# Altium PCB logic analyzer.pcbdoc
Units mil, origin at the board's own origin, x right, y up, seen from the top; angles counter-clockwise.
Board outline 1771.65 x 984.25 mil, 2 copper layers (Top Layer, Bottom Layer); 46 components, 39 nets, 224 pads, 64 vias.
Unrouted connection lines stored in the file: 47.
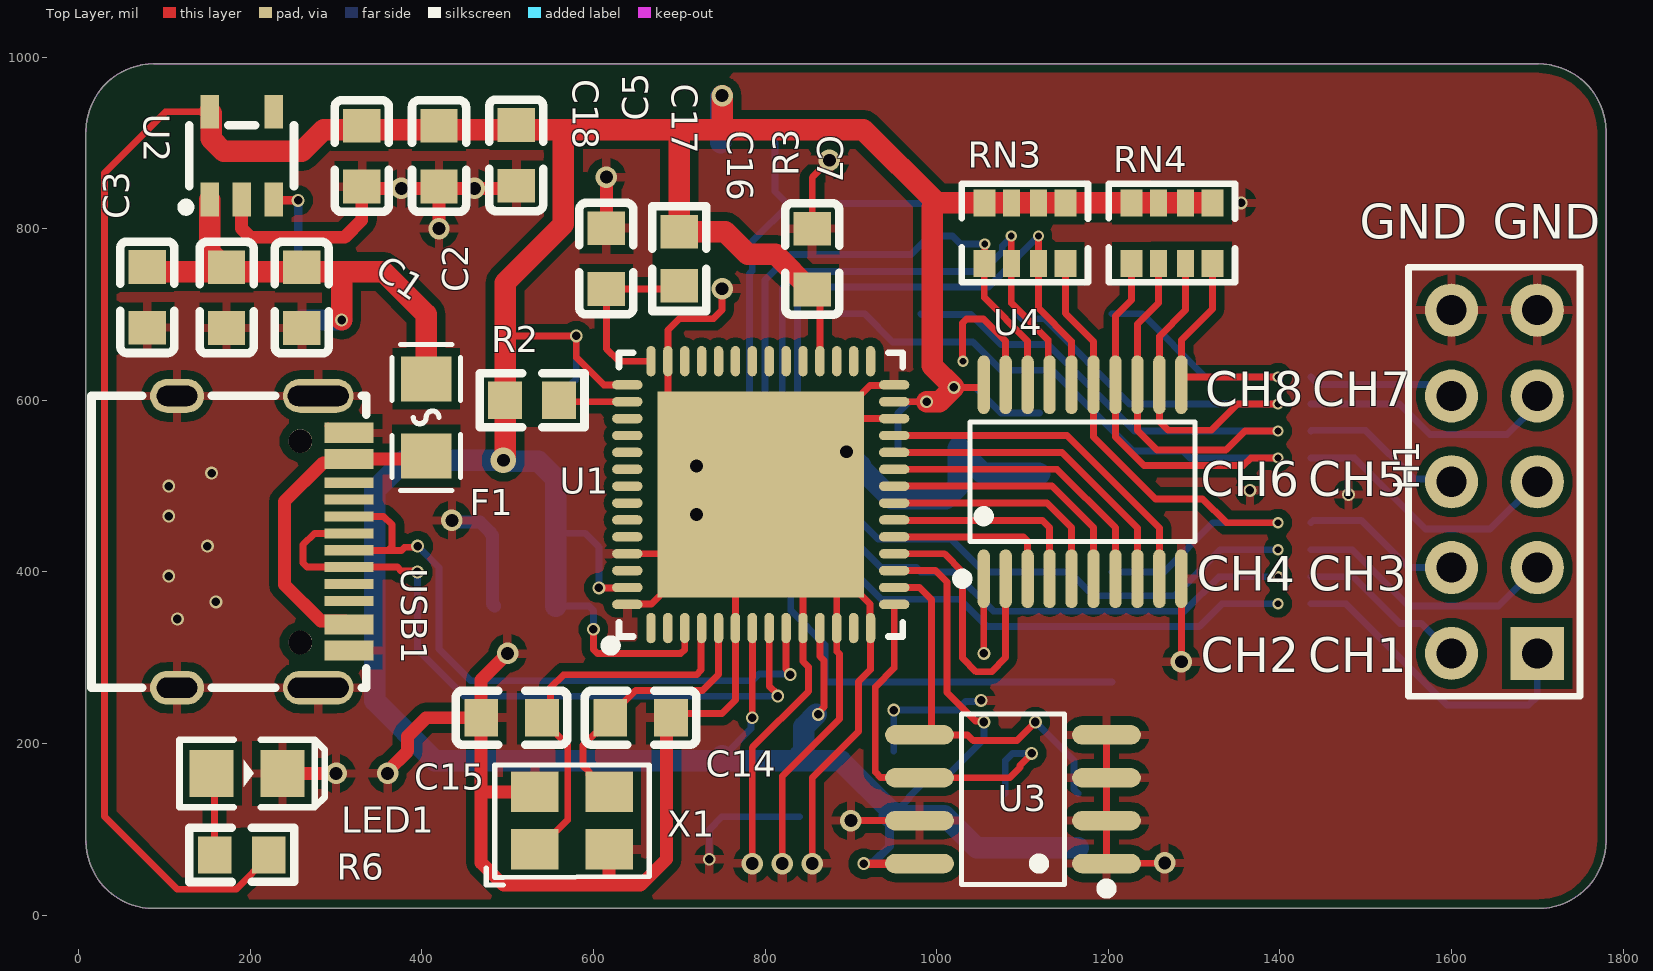
[diagram p0: Top Layer view]
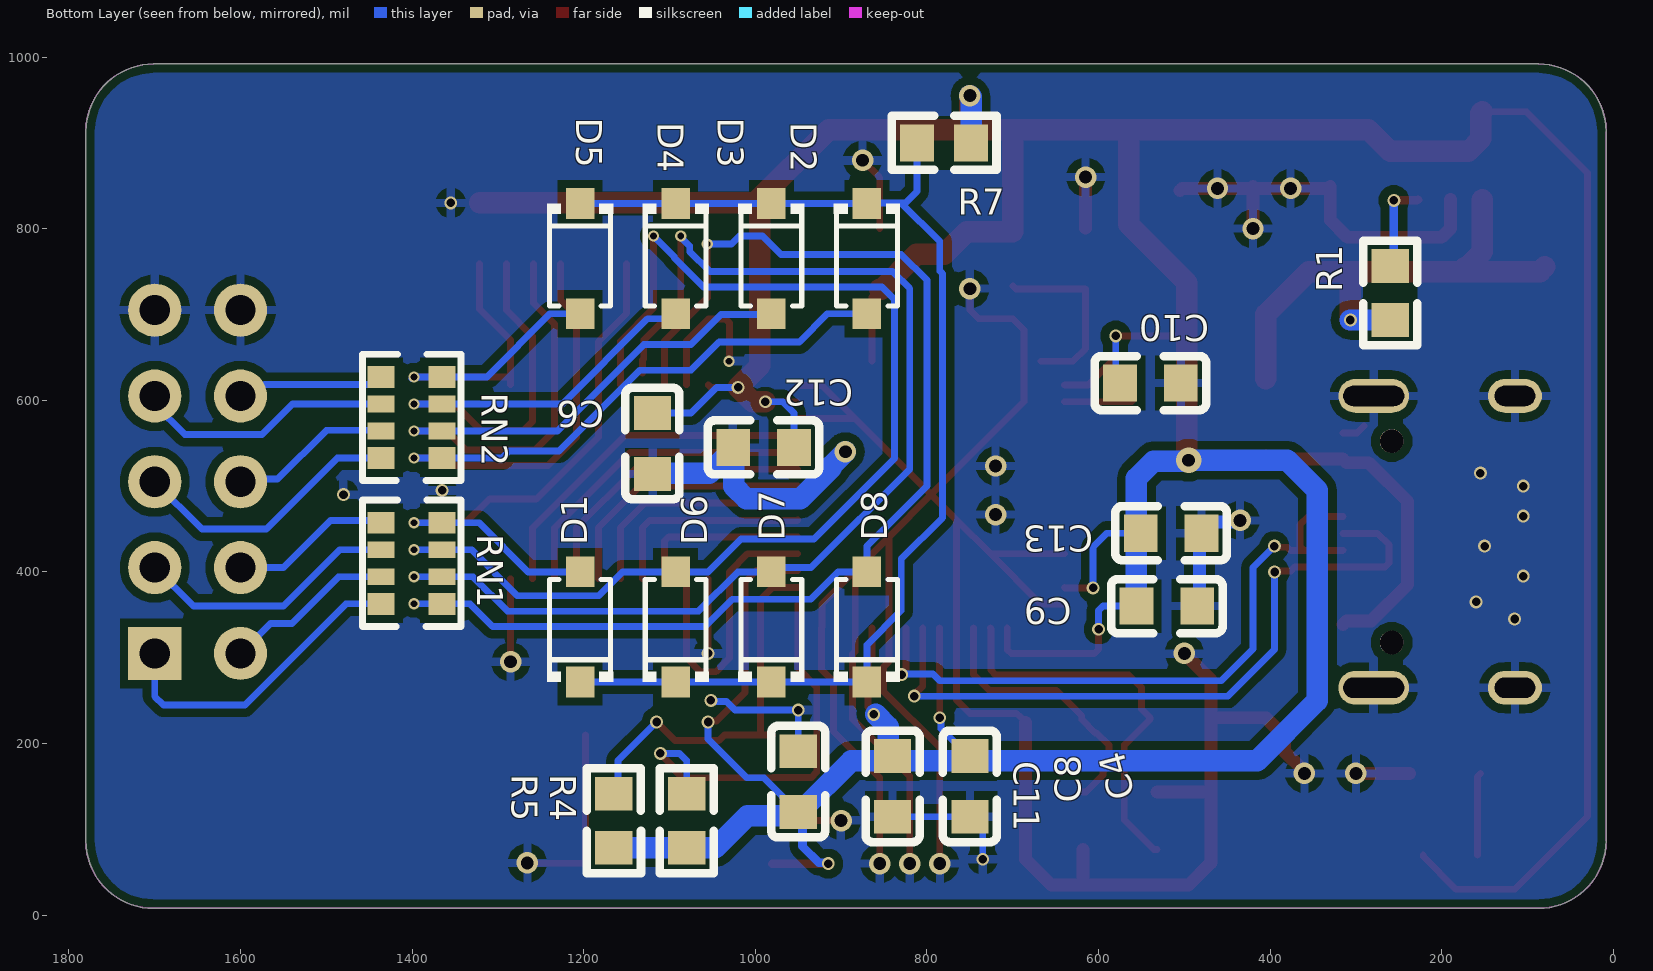
[diagram p1: Bottom Layer view, seen from below]

## Layer stack, top to bottom
Top Solder: solder mask 0.4, Solder Resist, Dk 3.5
Top Layer: signal copper 1.4
Dielectric1: dielectric 12.6, FR-4, Dk 4.8
Bottom Layer: signal copper 1.4
Bottom Solder: solder mask 0.4, Solder Resist, Dk 3.5

## Board outline
8.51,86.42 8.51,913.2 cw(c87.25,913.2) 87.25,991.94 1701.43,991.94 cw(c1701.43,913.2) 1780.17,913.2 1780.17,86.42 cw(c1701.43,86.42) 1701.43,7.68 87.25,7.68 cw(c87.25,86.42)

## Design rules (kind name [scope] priority, off if disabled: settings)
Clearance [All] p1: gap=10 ignorepadtopadclearanceinfootprint=TRUE except(0: Arc-Hole Track-Hole SMDPad-Hole THPad-Hole Via-Hole Fill-Hole Poly-Hole Region-Hole Text-Hole; 6: Arc-SMDPad Track-SMDPad)
PolygonConnect [All] p1: connectstyle=Relief reliefconductorwidth=10 reliefentries=4 polygonreliefangle="90 Angle" airgapwidth=10
RoutingVias [All] p1: holewidth=28 width=50 viastyle="Through Hole" minholewidth=5 minwidth=10 maxholewidth=99 maxwidth=100
SolderMaskExpansion [All] p1: expansion=4 istentingtop=FALSE
Width [All] p1: maxlimit=100 minlimit=6 preferedwidth=10 minimp=50.000000 maximp=50.000000 favimp=50.000000
30 further rules are at their usual default settings.

## Components (designator, comment, footprint, x,y, rotation, side; value= is the part's Value field where it differs from the comment)
C1 "0.1u" C0603 172.5,719.57 r90 top
C2 "0.1u" C0603 260,719.57 r90 top
C3 "0.1u" C0603 80,720 r90 top
C4 "0.1u" C0603 750,150 r90 bottom
C5 "0.1u" C0603 420,884.57 r90 top
C6 "0.1u" C0603 1120,549.57 r90 bottom
C7 "0.1u" C0603 855,764.57 r270 top
C8 "0.1u" C0603 840,150 r90 bottom
C9 "0.1u" C0603 520.43,360 r0 bottom
C10 "0.1u" C0603 539.57,620 r0 bottom
C11 "0.1u" C0603 950,155.43 r270 bottom
C12 "0.1u" C0603 990.43,545 r180 bottom
C13 "0.1u" C0603 515.43,445 r0 bottom
C14 "0.1u" C0603 655,230 r180 top
C15 "0.1u" C0603 504.57,230 r0 top
C16 "0.1u" C0603 615,765 r270 top
C17 "0.1u" C0603 510,885.43 r270 top
C18 "0.1u" C0603 330,884.57 r270 top
D1 "1N4148W" SOD-123_L3.1-W1.7-LS3.7-RD 1204.29,335.83 r90 bottom
D2 "1N4148W" SOD-123_L3.1-W1.7-LS3.7-RD 870,765 r270 bottom
D3 "1N4148W" SOD-123_L3.1-W1.7-LS3.7-RD 981.43,765 r270 bottom
D4 "1N4148W" SOD-123_L3.1-W1.7-LS3.7-RD 1092.86,765 r270 bottom
D5 "1N4148W" SOD-123_L3.1-W1.7-LS3.7-RD 1204.29,765 r270 bottom
D6 "1N4148W" SOD-123_L3.1-W1.7-LS3.7-RD 1092.86,335.83 r90 bottom
D7 "1N4148W" SOD-123_L3.1-W1.7-LS3.7-RD 981.43,335.83 r90 bottom
D8 "1N4148W" SOD-123_L3.1-W1.7-LS3.7-RD 870,335.83 r90 bottom
F1 "MF-PSMF075X-2" F0805 405,580 r90 top
H1 "HDR-F-2.54_2x5" HDR-F-2.54_2X5 1650,505 r90 top
LED1 "LED-0805_R" LED0805_RED 196.35,165 r0 top
R1 "10K" R0603 260,725 r90 bottom
R2 "10k" R0603 528.5,600 r0 top
R3 "1k" R0603 700,765 r90 top
R4 "10K" R0603 1080,110 r270 bottom
R5 "10K" R0603 1165,110 r270 bottom
R6 "1k" R0603 190,70 r0 top
R7 "1k" R0603 780,900 r180 bottom
RN1 "100R" RES-ARRAY-SMD_0603-8P-L3.2-W1.6-BL 1400.79,410 r270 bottom
RN2 "100R" RES-ARRAY-SMD_0603-8P-L3.2-W1.6-BL 1400.79,580 r270 bottom
RN3 "470" RES-ARRAY-SMD_0603-8P-L3.2-W1.6-BL 1102.76,794.57 r0 top
RN4 "100K" RES-ARRAY-SMD_0603-8P-L3.2-W1.6-BL 1274.25,794.57 r0 top
U1 "CY7C68013A-56LTXC" QFN-56_L8.0-W8.0-P0.50-TL-EP 795,490 r90 top
U2 "RT9013-33GB" SOT-23-5_L3.0-W1.7-P0.95-LS2.8-BR 190,885 r270 top
U3 "AT24C02" SOP-8_L5.0-W4.0-P1.27-LS6.0-BL 1088.97,135 r90 top
U4 "74HC245PW-Q100J" TSSOP-20_L6.5-W4.4-P0.65-LS6.4-BL 1170,505 r0 top
USB1 "TYPEC-304-BCP16" USB-C-SMD_TYPEC-304-BCP16 215,435 r270 top
X1 "24MHz" OSC-SMD_4P-L3.2-W2.5-BL 575,110 r0 top

## Footprints (in the part's own frame and the unit in brackets; to place one, negate y for a bottom-side part, rotate by r counter-clockwise, add the part's x,y. Pads: shape width x height; smd on the part's side, far side on the other; paste and mask are expansions set on the pad)
C0603 [mm]
  rect 1x1.1 smd: 1(-0.9,0) 2(0.9,0)
  silkscreen extent -1.65,-0.8 1.65,0.8
F0805 [mm]
  rect 1.335x1.5 smd: 1(-1.142,0) 2(1.142,0)
  silkscreen extent -2.16,-1.02 2.16,1.02
HDR-F-2.54_2X5 [mil]
  rect 62x62 hole 35: 1(-200,-50)
  round 62 hole 35: 2(-200,50) 3(-100,-50) 4(-100,50) 5(0,-50) 6(0,50) 7(100,-50) 8(100,50) 9(200,-50) 10(200,50)
  silkscreen extent -250,-100 250,100
LED0805_RED [mil]
  rect 51.2x55.1 smd: 1(-41.35,0) 2(41.35,0)
  silkscreen extent -79,-39 91,39
OSC-SMD_4P-L3.2-W2.5-BL [mm]
  rect 1.4x1.2 smd: 1(-1.1,-0.851) 2(1.1,-0.851) 3(1.1,0.851) 4(-1.1,0.851)
  silkscreen extent -2.54,-1.91 2.29,1.65
QFN-56_L8.0-W8.0-P0.50-TL-EP [mm]
  oval 0.9x0.28 smd: 1(-3.95,3.25) 2(-3.95,2.75) 3(-3.95,2.25) 4(-3.95,1.75) 5(-3.95,1.25) 6(-3.95,0.75) 7(-3.95,0.25) 8(-3.95,-0.25) 9(-3.95,-0.75) 10(-3.95,-1.25) 11(-3.95,-1.75) 12(-3.95,-2.25) 13(-3.95,-2.75) 14(-3.95,-3.25) 29(3.95,-3.25) 30(3.95,-2.75) 31(3.95,-2.25) 32(3.95,-1.75) 33(3.95,-1.25) 34(3.95,-0.75) 35(3.95,-0.25) 36(3.95,0.25) 37(3.95,0.75) 38(3.95,1.25) 39(3.95,1.75) 40(3.95,2.25) 41(3.95,2.75) 42(3.95,3.25)
  oval 0.28x0.9 smd: 15(-3.25,-3.95) 16(-2.75,-3.95) 17(-2.25,-3.95) 18(-1.75,-3.95) 19(-1.25,-3.95) 20(-0.75,-3.95) 21(-0.25,-3.95) 22(0.25,-3.95) 23(0.75,-3.95) 24(1.25,-3.95) 25(1.75,-3.95) 26(2.25,-3.95) 27(2.75,-3.95) 28(3.25,-3.95) 43(3.25,3.95) 44(2.75,3.95) 45(2.25,3.95) 46(1.75,3.95) 47(1.25,3.95) 48(0.75,3.95) 49(0.25,3.95) 50(-0.25,3.95) 51(-0.75,3.95) 52(-1.25,3.95) 53(-1.75,3.95) 54(-2.25,3.95) 55(-2.75,3.95) 56(-3.25,3.95)
  rect 6.1x6.1 smd: 57(0,0)
  silkscreen extent -4.62,-4.2 4.2,4.59
R0603 [mm]
  rect 1x1.1 smd: 1(-0.8,0) 2(0.8,0)
  silkscreen extent -1.55,-0.8 1.55,0.81
RES-ARRAY-SMD_0603-8P-L3.2-W1.6-BL [mm]
  rect 0.65x0.8 smd: 1(-1.2,-0.9) 4(1.2,-0.9) 5(1.2,0.9) 8(-1.2,0.9)
  rect 0.5x0.8 smd: 2(-0.4,-0.9) 3(0.4,-0.9) 6(0.4,0.9) 7(-0.4,0.9)
  silkscreen extent -1.87,-1.45 1.87,1.47
SOD-123_L3.1-W1.7-LS3.7-RD [mm]
  rect 0.91x0.84 smd: 1(-1.63,0) 2(1.63,0)
  silkscreen extent -1.63,-0.98 1.4,0.98
SOP-8_L5.0-W4.0-P1.27-LS6.0-BL [mil]
  oval 22.6x80.14 smd: 1(-75,-108.97) 2(-25,-108.97) 3(25,-108.97) 4(75,-108.97) 5(75,108.97) 6(25,108.97) 7(-25,108.97) 8(-75,108.97)
  silkscreen extent -110,-115 99,60
SOT-23-5_L3.0-W1.7-P0.95-LS2.8-BR [mm]
  rect 1x0.55 smd: 1(1.3,-0.95) 2(1.3,0) 3(1.3,0.95) 4(-1.3,0.95) 5(-1.3,-0.95)
  silkscreen extent -0.9,-1.78 1.65,1.55
TSSOP-20_L6.5-W4.4-P0.65-LS6.4-BL [mm]
  oval 0.364x1.742 smd: 1(-2.925,-2.871) 2(-2.275,-2.871) 3(-1.625,-2.871) 4(-0.975,-2.871) 5(-0.325,-2.871) 6(0.325,-2.871) 7(0.975,-2.871) 8(1.625,-2.871) 9(2.275,-2.871) 10(2.925,-2.871) 11(2.925,2.871) 12(2.275,2.871) 13(1.625,2.871) 14(0.975,2.871) 15(0.325,2.871) 16(-0.325,2.871) 17(-0.975,2.871) 18(-1.625,2.871) 19(-2.275,2.871) 20(-2.925,2.871)
  silkscreen extent -3.71,-3.02 3.33,1.77
USB-C-SMD_TYPEC-304-BCP16 [mm]
  oval 1x2.1 hole 0.6 slot 1.8 at 90 deg: 13(-4.32,1.633) 14(4.32,1.633)
  oval 1x1.6 hole 0.6 slot 1.2 at 90 deg: 15(-4.32,-2.547) 16(4.32,-2.547)
  rect 0.6x1.45 smd: A1B12(-3.225,2.547) A4B9(-2.45,2.547) B1A12(3.22,2.547) B4A9(2.45,2.547)
  rect 0.3x1.45 smd: A5(-1.25,2.547) A6(-0.25,2.547) A7(0.25,2.547) A8(1.25,2.547) B5(1.75,2.547) B6(0.75,2.547) B7(-0.75,2.547) B8(-1.75,2.547)
  round 0.7 hole 0.7 unplated: ""(-2.98,1.102) ""(2.98,1.102)
  silkscreen extent -4.32,-5.08 4.32,3.05

## Via types
v1: diameter 15, hole 10, Top Layer to Bottom Layer, 31 vias
v2: diameter 25, hole 15, Top Layer to Bottom Layer, 20 vias
v3: diameter 13, hole 8, Top Layer to Bottom Layer, 12 vias
v4: diameter 30, hole 15, Top Layer to Bottom Layer, 1 vias

## Nets (pads, with @x,y where several pads share a name; then routed paths per layer and width w, separated by ;. In a path a pad name is that pad's centre, name@x,y a point inside that pad or via, vN(x,y) a via of type N, cw(c..) or ccw(c..) an arc to the next point about the centre after c; other vN are vias at no path point)
3V3: C4.2 C5.2 C6.2 C7.2 C8.2 C9.2 C10.2 C11.2 C12.2 C13.2 C17.1 C18.1 R2.1 R3.2 R4.2 R5.2 R6.2 R7.2 RN3.5 RN3.6 RN3.7 RN3.8 RN4.5 RN4.6 RN4.7 RN4.8 U1.3 U1.7 U1.11 U1.17 U1.27 U1.32 U1.43 U1.55 U2.5 U3.8 U4.20 | length 6851.9
  Top Layer w8: U2.5 101.19,936.19 30,865 30,115 115,30 183.46,30 221.5,68.03 R6.2 ; 497.01,668.51 503.51,675 v1(580,675) 580,650 612.05,617.95 U1.43 ; v1(600,333.05) 600,309.69 604.69,305 701.73,305 706.42,309.69 U1.3 ; v1(606.3,381.3) 639.06,381.3 U1.55 ; v1(785,230) 785,276.98 785.16,277.14 U1.7 ; C7.2 863.9,720.23 U1.32 ; v1(861.95,233.84) 861.95,235.74 868.82,242.61 868.82,296.63 863.9,301.56 U1.11 ; U1.17 998.58,401.42 1012,388 1012,259.58 1045.24,226.34 1053.66,226.34 v1(1055,225) ; U1.27 v1(988.27,598.27) ; v1(1020,615) 1051.92,615 1054.84,617.92 U4.20
  Top Layer w10: v1(915,60) U3.8
  Top Layer w25: U2.5 154.28,934.51 154.28,904.64 168.92,890 260,890 285.43,915.43 330,915.43 420,915.43 505,915.43 565,915.43 ; v4(495,530) 497.01,532.01 R2.1 497.01,668.51 497.01,737.01 565,805 565,915.43 ; v2(750,955) 750,915.43 ; C7.2 853.03,729.13 812.17,770 780,770 753.5,796.5 R3.2 700,910.86 704.57,915.43 ; v1(988.27,598.27) 1003.27,598.27 v1(1020,615) 995,640 995,825 1000,830 ; RN4.5 RN4.6 RN4.7 RN4.8 RN3.5 RN3.6 RN3.7 RN3.8 1000,830 ; 565,915.43 704.57,915.43 ; 704.57,915.43 750,915.43 ; 750,915.43 914.56,915.43 1000,830
  Bottom Layer w8: C13.2 555.87,445 590,445 606.3,428.7 v1(606.3,381.3) ; C9.2 595,360 600,355 v1(600,333.05) ; C10.2 580,625 v1(580,675) ; C4.2 751.97,185.43 783.66,217.13 783.66,228.66 v1(785,230) ; C11.2 951.97,120 967.65,135.68 967.65,137.65 990,160 1010,160 1055,205 v1(1055,225) ; C12.2 955,585 968.27,598.27 v1(988.27,598.27) ; v1(1020,615) 1045,615 1075,585 C6.2
  Bottom Layer w10: v1(915,60) 915.91,60.91 925.91,60.91 945,80 C11.2@945,115
  Bottom Layer w25: C9.2 555.87,445 555.87,509.13 535.96,529.04 495.96,529.04 v4(495,530) 380,530 345,495 345,250 415,180 C4.2@755.43,180 ; R7.2 748.5,953.5 v2(750,955) ; C4.2 C4.2@755.43,180 ; C8.2@840,180 888.03,180 948.03,120 C11.2 ; v1@859.64,233.84 845,219.2 845,190.43 C8.2 834.57,180 C4.2@755.43,180 ; C11.2@945,115 945.85,115.85 1009.15,115.85 1046.49,78.5 R4.2 R5.2
+5V: C1.2 C2.2 C3.2 F1.2 R1.1 U2.1 | length 615.6
  Top Layer w25: C3.2 85.43,750 310,750 ; U2.1 152.6,772.93 170.53,755 C1.2 ; v1(306.49,693.51) 306.49,746.49 310,750 ; F1.2 405,700 355,750 310,750
  Bottom Layer w25: R1.1 v1(306.49,693.51)
D1_1: D1.1 D2.1 D3.1 D4.1 D5.1 D6.1 D7.1 D8.1 R7.1 | length 1404.2
  Bottom Layer w8: R7.1 811.49,843.51 825,830 830,830 ; D1.1 D6.1 D7.1 D8.1 870,315 830,355 830,415 782,463 782,747.46 785,750.46 785,785 830,830 ; D5.1 D4.1 D3.1 871.65,829.17 870.83,830 830,830
DN: U1.9 USB1.A7 USB1.B7 | length 782.2
  Top Layer w8: USB1.A7 315.45,425 360.31,425 ; USB1.B7 355.47,464.53 365,455 365,429.69 360.31,425 ; v1(395,430) 393.66,428.66 379.97,428.66 376.31,425 360.31,425 ; U1.9 824.53,286.96 829.32,282.17 v1(829.32,280.27)
  Bottom Layer w8: v1(395,430) 420,405 420,310 457,273 785,273 792.95,280.95 828.65,280.95 v1(829.32,280.27)
DP: U1.8 USB1.A6 USB1.B6 | length 834.5
  Top Layer w8: USB1.A6 274.75,444.85 261.5,431.59 261.5,410.16 266.19,405.47 USB1.B6 371.5,405.47 375.84,401.14 393.46,401.14 v1(394.8,399.8) ; U1.8 804.84,267.05 814.8,257.1 v1(814.8,255.2)
  Bottom Layer w8: v1(394.8,399.8) 395,399.59 395,309.54 449.54,255 814.59,255 v1(814.8,255.2)
GND: C1.1 C2.1 C3.1 C4.1 C5.1 C6.1 C7.1 C8.1 C9.1 C10.1 C11.1 C12.1 C13.1 C14.1 C15.1 C16.1 C17.2 C18.2 H1.9 H1.10 LED1.2 U1.6 U1.10 U1.12 U1.14 U1.26 U1.28 U1.41 U1.53 U1.56 U1.57 U2.2 U3.1 U3.2 U3.3 U3.4 U3.7 U4.1 U4.10 U4.19 USB1.13 USB1.14 USB1.15 USB1.16 USB1.A1B12 USB1.B1A12 X1.2 X1.4 | length 5519.1
  Top Layer w8: USB1.13 USB1.13@290.75,593.6 ; USB1.A1B12@290.75,569.78 298.56,561.97 USB1.A1B12 ; U1.56 640.05,362.61 667.61,362.61 U1.57@726.1,421.1 ; U1.53 U1.57@726.1,421.1 ; C14.1@685,224.57 C14.1 695.43,235 750,235 765.47,250.47 U1.6 U1.57@765.47,460.47 ; v2(750,730) 750,705 740,695 700,695 686.73,681.73 U1.41 686.73,598.27 U1.57 ; v2(785,60) 785,195 850.82,260.82 850.82,289.18 844.21,295.79 U1.10 U1.57@844.21,440.79 ; v2(820,60) 820,161.49 886.82,228.31 886.82,304.09 883.58,307.33 U1.12 U1.57@883.58,401.42 ; v2@855,55 855,160 908.97,213.97 908.97,271.92 922.95,285.9 U1.14 922.39,335.05 922.39,362.61 U1.57@883.58,401.42 ; C7.1 855,859.39 875,879.39 v2(875,879.69) ; v2@895,115 v2(900,110) U3.7 ; U1.26 U1.57@883.58,578.58 ; U1.28 949.95,617.39 922.39,617.39 U1.57@883.58,578.58 ; v3(1030.51,645.51) 1030,646.01 1030,690.09 1034.69,694.77 1054.77,694.77 1080.43,669.11 U4.19 ; U4.1 1054.92,391.89 1054.92,305.08 v1(1055,305) ; U3.4 U3.3 U3.2 U3.1 1198.33,60.4 1265.4,60.4 v2(1265.79,60.79) ; v2@1285,295 v2(1285.16,295.16) U4.10 ; U1.57@726.1,421.1 U1.57@765.47,460.47 ; U1.57@765.47,460.47 U1.57 ; U1.57 U1.57@844.21,440.79 ; U1.57 U1.57@883.58,578.58 ; U1.57@844.21,440.79 U1.57@883.58,401.42
  Top Layer w15: U2.2 190,800 200,790 310,790 330,810 C18.2 332.28,846.85 C5.1@420,846.85 ; LED1.2 v2(300,165) ; v2(360,165) 360,167.58 383.46,191.04 383.46,208.46 405,230 C15.1 ; v2(420,800) C5.1@420,846.85 ; C5.1 C5.1@420,846.85 ; v2(500,305) 469.13,274.13 C15.1 ; C17.2@505,844.57 502.72,846.85 C5.1@420,846.85 ; X1.4 471.06,143.51 469.13,145.43 ; C16.1 v2(615,860) ; X1.2 618.31,36.69 620,35 ; C14.1@685,224.57 685,65 655,35 620,35 ; 469.13,145.43 C15.1 ; 469.13,145.43 469.13,60.87 495,35 620,35
  Bottom Layer w8: v1(735,65) 735,99.57 C4.1 C8.1 ; C11.1 v1(950,238.77) 1023.77,238.77 1033.81,248.81 1050.49,248.81 v1(1051.83,250.15) ; C12.1@1025.87,543.03 C12.1
  Bottom Layer w15: v2(435,460) 436.91,458.09 467.81,458.09 480,445.9 C13.1 482.5,442.5 482.5,362.5 C9.1
  Bottom Layer w25: v2(895,540) 911.33,523.67 911.33,521.17 947.5,485 1010.36,485 1025,499.64 1025,544.13 C12.1 ; C12.1@1025.87,543.03 1053.9,515 1119.13,515 C6.1
  other v1: 115,345 160,365 105,395 150,430 105,465 1480,490 1365,495 105,500 155,515 1355,830
  other v2: 855,60 720,466.67 720,523.33 376.14,846.85 461.36,846.85
IN0: D8.2 RN1.5 RN3.1 U4.18 | length 1400.8
  Top Layer w8: v3(1056.02,782.06) 1056.02,759.65 RN3.1 1055.52,719.48 1106.02,668.98 U4.18
  Bottom Layer w8: v3(1056.02,782.06) 1027.86,782.06 1018.36,791.55 991.55,791.55 970,770 830,770 800,740 800,500 870,430 D8.2 903.77,400 935.72,368.04 1026.96,368.04 1058.91,336.09 1306.09,336.09 1332.76,362.76 RN1.5 v3(1397.77,362.76)
IN1: D7.2 RN1.6 RN3.2 U4.17 | length 1348.4
  Top Layer w8: v3(1087.01,791.55) RN3.2 1087.01,713.45 1130,670.46 1130,648.48 1131.61,646.87 U4.17@1131.61,631.59
  Bottom Layer w8: v3(1087.01,791.55) 1087.01,790.19 1076.52,779.71 1076.52,773.56 1052.96,750 840,750 820,730 820,520 935,405 976.43,405 D7.2 1020.46,400 1066.37,354.09 1289.09,354.09 1329.25,394.25 RN1.6 v3(1397.77,394.25)
IN2: D6.2 RN1.7 RN3.3 U4.16 | length 1335.3
  Top Layer w8: v3(1118.51,791.55) RN3.3 1118.51,707.4 1157.2,668.71 U4.16
  Bottom Layer w8: v3(1118.51,791.55) 1094.52,767.56 1094.52,766.11 1060.42,732 852.58,732 838,717.42 838,532 931.66,438.34 1016.66,438.34 1055,400 D6.2 1155,400 1182.91,372.09 1277.09,372.09 1330.75,425.75 RN1.7 v3(1397.77,425.75)
IN3: D1.2 RN1.8 RN3.4 U4.15 | length 689.1
  Top Layer w8: RN3.4 1150,701.37 1182.8,668.57 U4.15 1182.8,557.21 1255,485 1310,485 1337.76,457.24 v3(1397.76,457.24)
  Bottom Layer w8: D1.2 1265,400 1322.24,457.24 RN1.8 v3(1397.76,457.24)
IN4: D2.2 RN2.5 RN4.1 U4.14 | length 1013.9
  Top Layer w8: RN4.1 1227.01,717.01 1208.39,698.39 U4.14 1208.39,557.07 1241.46,524 1357.33,524 1366.09,532.76 v3(1397.77,532.76)
  Bottom Layer w8: D2.2 915.85,700.83 948.77,667.91 1042.09,667.91 1075,635 1134.54,635 1228.91,540.63 1287.32,540.63 1295.2,532.76 v3(1397.77,532.76)
IN5: D3.2 RN2.6 RN4.2 U4.13 | length 859.8
  Top Layer w8: RN4.2 1258.5,713.5 1233.98,688.98 1233.98,564.82 1256.8,542 1337,542 1359.25,564.25 v3(1397.77,564.25)
  Bottom Layer w8: D3.2 982.26,700 1040,700 1075,665 1130,665 1230.75,564.25 RN2.6 v3(1397.77,564.25)
IN6: D4.2 RN2.7 RN4.3 U4.12 | length 700
  Top Layer w8: RN4.3 1290,705 1259.57,674.57 1259.57,575.43 1270,565 1320,565 1350.75,595.75 v3(1397.77,595.75)
  Bottom Layer w8: D4.2 1098.68,695 1125.46,695 1224.71,595.75 RN2.7 v3(1397.77,595.75)
IN7: D5.2 RN2.8 RN4.4 U4.11 | length 497.1
  Top Layer w8: U4.11 U4.11@1285.16,624.31 ; RN4.4 1321.49,706.49 1285.16,670.16 U4.11@1285.16,624.31 ; v3(1397.76,627.24) 1288.08,627.24 U4.11@1285.16,624.31
  Bottom Layer w8: D5.2 1239.17,700.83 1312.76,627.24 RN2.8 v3(1397.76,627.24) v3@1400,625
P0: H1.1 RN1.4 | length 366.7
  Bottom Layer w8: RN1.4 1477.24,362.76 1595,245 1690,245 1700,255 H1.1
P1: H1.2 RN1.3 | length 200.7
  Bottom Layer w8: RN1.3 1485.75,394.25 1540,340 1565,340 H1.2
P2: H1.3 RN1.2 | length 309.7
  Bottom Layer w8: RN1.2 1484.25,425.75 1550,360 1655,360 H1.3
P3: H1.4 RN1.1 | length 187.7
  Bottom Layer w8: RN1.1 1438.97,460 1495,460 1550,405 H1.4
P4: H1.5 RN2.4 | length 320.8
  Bottom Layer w8: RN2.4 1487.24,532.76 1570,450 1645,450 H1.5
P5: H1.6 RN2.3 | length 188.9
  Bottom Layer w8: RN2.3 1436.97,565 1500,565 1557,508 1597,508 H1.6
P6: H1.7 RN2.2 | length 303.1
  Bottom Layer w8: RN2.2 1539.25,595.75 1575,560 1665,560 1700,595 H1.7
P7: H1.8 RN2.1 | length 173
  Bottom Layer w8: RN2.1 1445.01,618.45 1571.94,618.45 1585.39,605 H1.8
R6_1: LED1.1 R6.1 | length 96.5
  Top Layer w8: LED1.1 158.51,161.49 R6.1
SCL: R4.1 U1.15 U3.6 | length 475.6
  Top Layer w8: U1.15 950.51,288 928.44,265.93 928.44,166.65 934.69,160.41 979.59,160.41 U3.6 1085,160 1097.19,172.19 1097.19,174.34 1110.71,187.87 v1(1110.71,188.39)
  Bottom Layer w8: R4.1 1080,180 1088.39,188.39 v1(1110.71,188.39)
SDA: R5.1 U1.16 U3.5 | length 458.1
  Top Layer w8: U1.16 980,381.73 994,367.73 994,210.74 U3.5@993.26,210 ; U3.5 U3.5@993.26,210 ; v1(1115,225) 1093.5,203.5 1042.62,203.5 1036.12,210 U3.5@993.26,210
  Bottom Layer w8: v1(1115,225) 1160,180 1160,146.49 R5.1
U1_4: C15.2 U1.4 X1.1 | length 456.5
  Top Layer w8: X1.1 535.63,76.5 570,110.87 570,198.03 540,228.03 C15.2 550,240 550,265 565,280 720,280 725.52,285.52 725.52,333.91 U1.4
U1_5: C14.2 U1.5 X1.3 | length 317.7
  Top Layer w8: X1.3 614.37,143.51 594.75,163.13 594.75,167.07 588,173.81 588,198 602.35,212.35 603.88,212.35 619.57,228.03 619.57,231.97 649.25,261.65 727.11,261.65 745.79,280.33 U1.5
U1_18: U1.18 U4.2 | length 344.5
  Top Layer w8: U1.18 1008.9,421.1 1030,400 1030,299.59 1046.09,283.5 1063.91,283.5 1080.43,300.03 U4.2
U1_19: U1.19 U4.3 | length 201.6
  Top Layer w8: U1.19 1101.34,440.79 1106.02,436.1 U4.3
U1_20: U1.20 U4.4 | length 244.5
  Top Layer w8: U1.20 950.98,460 1123.45,460 1131.61,451.84 U4.4
U1_21: U1.21 U4.5 | length 278.2
  Top Layer w8: U1.21 1128.75,480.16 1157.2,451.7 U4.5
U1_22: U1.22 U4.6 | length 312
  Top Layer w8: U1.22 950.67,500 1134.36,500 1182.8,451.57 U4.6
U1_23: U1.23 U4.7 | length 345.5
  Top Layer w8: U1.23 1140.29,519.53 1208.39,451.43 U4.7
U1_24: U1.24 U4.8 | length 379.2
  Top Layer w8: U1.24 1146.06,539.21 1233.98,451.3 U4.8
U1_25: U1.25 U4.9 | length 412.9
  Top Layer w8: U1.25 1151.83,558.9 1259.57,451.16 U4.9
U1_42: C16.2 R3.1 U1.42 | length 214.3
  Top Layer w8: U1.42 629.49,645.51 615,660 C16.2 696.06,729.57 R3.1
U1_44: R2.2 U1.44 | length 80.2
  Top Layer w8: R2.2 561.73,598.27 U1.44
U2_3: R1.2 U2.3 | length 106.9
  Top Layer w10: U2.3 228.35,832.87 v1(255.78,832.87)
  Bottom Layer w10: v1(255.78,832.87) 255.78,760.71 R1.2
USB1_B4A9: F1.1 USB1.A4B9 USB1.B4A9 | length 378.6
  Top Layer w15: USB1.B4A9 310.98,342.86 282.14,342.86 240,385 240,482.15 285,527.15 310.98,527.15 USB1.A4B9 401.44,531.46 F1.1
pads on no net: U1.1 U1.2 U1.13 U1.29 U1.30 U1.31 U1.33 U1.34 U1.35 U1.36 U1.37 U1.38 U1.39 U1.40 U1.45 U1.46 U1.47 U1.48 U1.49 U1.50 U1.51 U1.52 U1.54 U2.4 USB1. USB1.A5 USB1.A8 USB1.B5 USB1.B8

## Polygon pours and split planes (outlines as drawn)
GND on Top Layer "GND_L01_P000" (solid, remove dead copper, pour order 0): 0,1020 1735,1020 1800,955 1800,35 1765,0 0,0
GND on Bottom Layer "GND_L02_P001" (solid, remove dead copper, pour order 1): 0,1050 1715,1050 1835,930 1835,30 1805,0 0,0

## Keep-outs
Keep-Out Layer:
  the board outline again, w0.5

## Silkscreen, mask and mechanical layers (free items; w line width, h text height)
Top Overlay:
  text "GND" at 1493,788 h40
  text "GND" at 1648,788 h40
  text "CH8" at 1313,593 h40
  text "CH7" at 1438,593 h40
  text "CH6" at 1308,488 h40
  text "CH5" at 1433,488 h40
  text "CH4" at 1303,378 h40
  text "CH3" at 1433,378 h40
  text "CH2" at 1308,283 h40
  text "CH1" at 1433,283 h40
Mechanical 1:
  the board outline again, w0.5